# Altium PCB MCS17.PcbDoc (part 3 of 3)
Units mil, origin at the board's own origin, x right, y up, seen from the top; angles counter-clockwise.
Board outline 8500 x 5400 mil, 2 copper layers (Top Layer, Bottom Layer), stack 81.54 mil thick; 114 components, 70 nets, 364 pads, 106 vias.
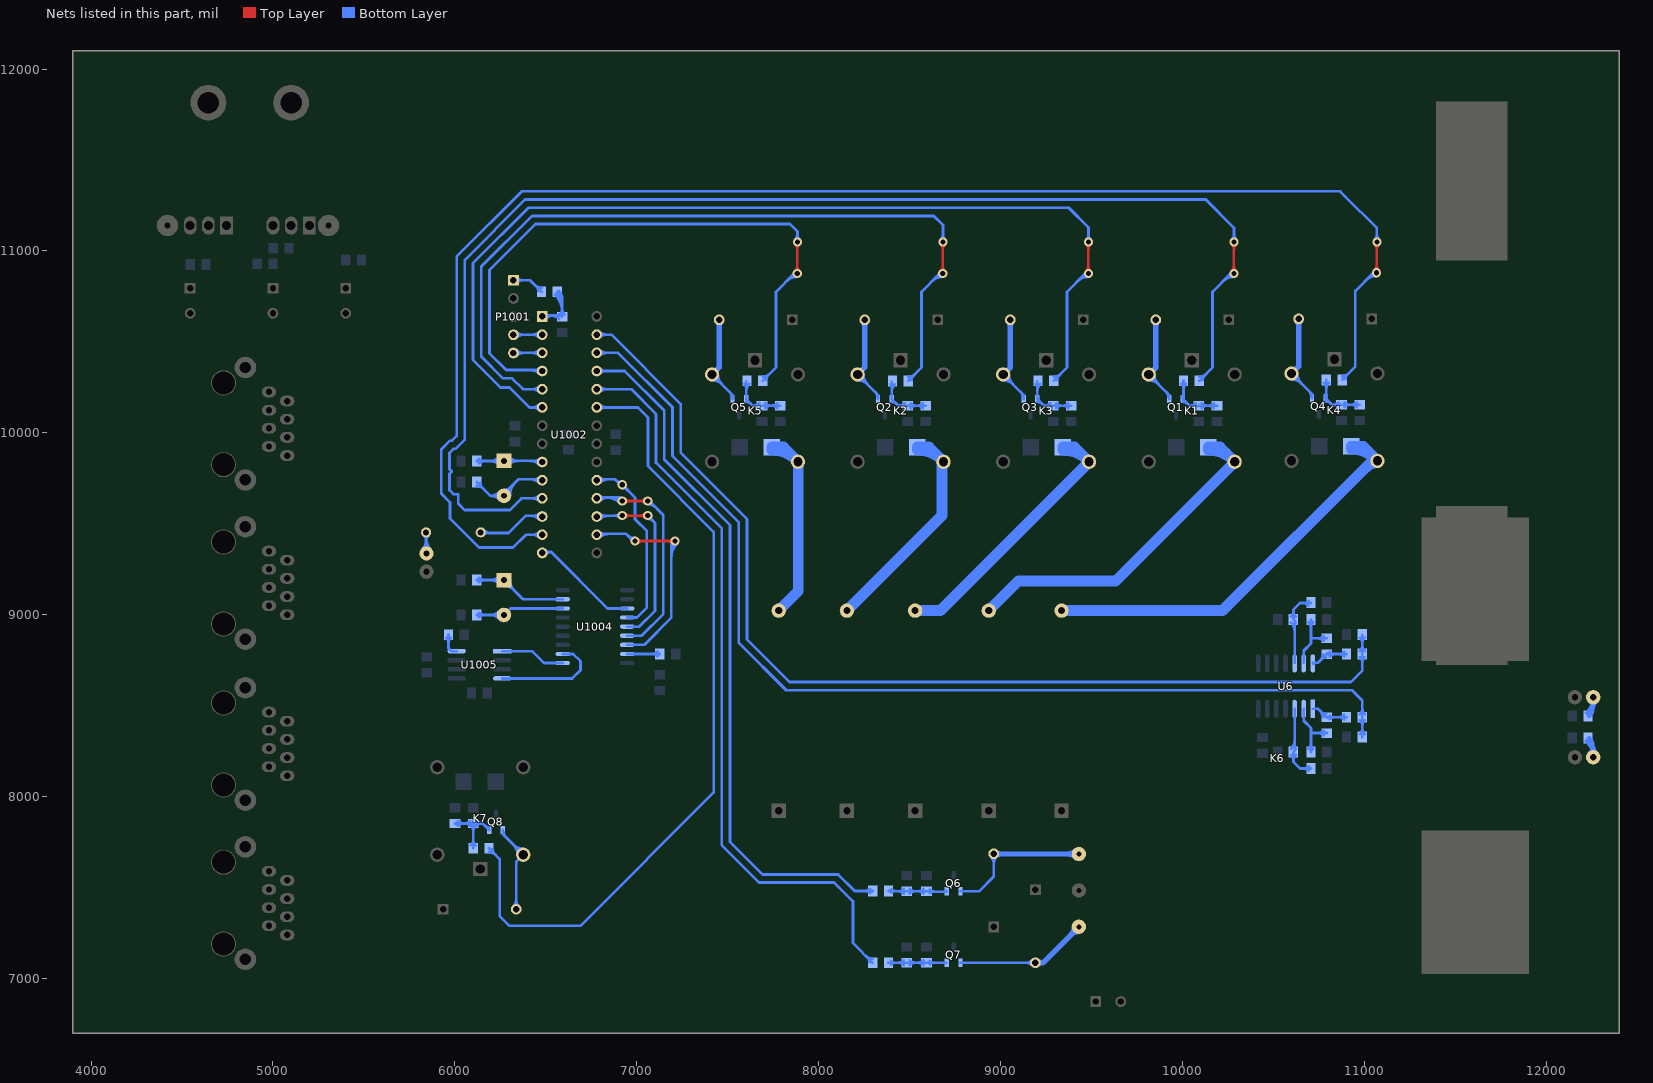
[diagram p3: the nets of this part, all layers, seen from the top]

## Via types
v1: diameter 50, hole 28, Top Layer to Bottom Layer, 85 vias
v2: diameter 196.85, hole 118.11, Top Layer to Bottom Layer, 12 vias
v3: diameter 157.48, hole 157.48, Top Layer to Bottom Layer, 7 vias
v4: diameter 137.8, hole 137.8, Top Layer to Bottom Layer, 2 vias

## Nets (pads, with @x,y where several pads share a name; then routed paths per layer and width w, separated by ;. In a path a pad name is that pad's centre, name@x,y a point inside that pad or via, vN(x,y) a via of type N, cw(c..) or ccw(c..) an arc to the next point about the centre after c; other vN are vias at no path point) (continued)
LED: R1001.2 U1002.12 | length 525.6
  Bottom Layer w15: R1001.2@6143.31,9450 6295,9450 6390,9545 U1002.12@6470,9545 ; R1001.2@6156.18,9438.82 cw(c6183.18,9411.82) 6183.18,9450 ; R1001.2@6156.18,9467.18 ccw(c6197.67,9508.67) 6197.67,9450 ; 6414.75,9545 cw(c6414.75,9474.75) U1002.12@6464.42,9524.42 ; 6438.89,9545 ccw(c6438.89,9581.11) U1002.12@6464.42,9555.58
MCP2515_INT: U1002.14 U1004.12 | length 671.3
  Bottom Layer w15: U1002.14@6470,9345 6480,9345 6530,9345 ; U1002.14@6495.58,9355.58 ccw(c6521.11,9381.11) 6521.11,9345 ; U1002.14@6498.43,9327.94 cw(c6530,9307.27) 6530,9345 ; U1004.12@6947.17,9035 6840,9035 6530,9345
MCP2515_MISO: U1002.18 U1004.15 | length 1666
  Top Layer w15: v1(6920,9625) v1(7060,9625) ; v1@6932.37,9612.63 cw(c6962.25,9582.75) 6962.25,9625 cw(c6962.25,9667.25) v1@6932.37,9637.37 ; v1@7047.63,9612.63 ccw(c7017.75,9582.75) 7017.75,9625 ccw(c7017.75,9667.25) v1@7047.63,9637.37
  Bottom Layer w15: U1002.18@6770,9645 6780,9645 6900,9645 v1(6920,9625) ; U1002.18@6795.58,9624.42 cw(c6845.25,9574.75) 6845.25,9645 ; U1002.18@6795.58,9655.58 ccw(c6821.11,9681.11) 6821.11,9645 ; 6829.47,9645 cw(c6829.47,9534.47) v1@6907.63,9612.63 ; 6865.68,9645 cw(c6865.68,9570.68) v1@6918.23,9623.23 ; 6901.89,9645 cw(c6901.89,9606.89) v1@6928.84,9633.84 ; U1004.15@6947.17,8885 7027.28,8885 7145,9002.72 7145,9550 7070,9625 v1(7060,9625) ; v1@7060,9607.5 cw(c7060,9541.11) 7106.95,9588.05 ; v1@7077.5,9625 ccw(c7095.61,9625) 7082.8,9612.2
MCP2515_MOSI: U1002.17 U1004.14 | length 1377.8
  Top Layer w15: v1(6920,9545) v1(7060,9545) v1@7070,9545 ; v1@6932.37,9532.63 cw(c6962.25,9502.75) 6962.25,9545 cw(c6962.25,9587.25) v1@6932.37,9557.37 ; v1@7047.63,9532.63 ccw(c7017.75,9502.75) 7017.75,9545 ccw(c7017.75,9587.25) v1@7047.63,9557.37
  Bottom Layer w15: U1002.17@6770,9545 6780,9545 v1(6920,9545) ; U1002.17@6795.58,9524.42 cw(c6845.25,9474.75) 6845.25,9545 ; U1002.17@6795.58,9555.58 ccw(c6821.11,9581.11) 6821.11,9545 ; v1@6907.63,9532.63 ccw(c6877.75,9502.75) 6877.75,9545 ccw(c6877.75,9587.25) v1@6907.63,9557.37 ; U1004.14@6947.17,8935 7013.64,8935 7100,9021.36 7100,9505 v1(7060,9545) ; v1@7060,9527.5 cw(c7060,9485.25) 7089.87,9515.13 cw(c7119.75,9545) v1@7077.5,9545
MCP2515_SCK: U1002.19 U1004.13 | length 1221.1
  Bottom Layer w15: U1002.19@6770,9745 6780,9745 6880,9745 6900,9725 6910,9725 v1(6920,9715) 6990,9645 6990,9525 7055,9460 7055,9040 7000,8985 U1004.13@6947.17,8985 ; U1002.19@6795.58,9724.42 cw(c6845.25,9674.75) 6845.25,9745 ; U1002.19@6795.58,9755.58 ccw(c6821.11,9781.11) 6821.11,9745 ; 6885,9740 ccw(c6907.21,9762.21) v1@6915.42,9731.89 ; 6897.2,9727.8 cw(c6884.39,9715) v1@6902.5,9715 ; v1@6920,9697.5 cw(c6920,9655.25) 6949.87,9685.13 cw(c6979.75,9715) v1@6937.5,9715
MCP2515_SS: U1002.16 U1004.16 | length 1645
  Top Layer w15: v1(6990,9405) v1(7210,9405) ; v1@7002.37,9392.63 cw(c7032.25,9362.75) 7032.25,9405 cw(c7032.25,9447.25) v1@7002.37,9417.37 ; v1@7197.63,9392.63 ccw(c7167.75,9362.75) 7167.75,9405 ccw(c7167.75,9447.25) v1@7197.63,9417.37
  Bottom Layer w15: U1002.16@6770,9445 6780,9445 6940,9445 6980,9405 v1(6990,9405) ; U1002.16@6795.58,9424.42 cw(c6845.25,9374.75) 6845.25,9445 ; U1002.16@6795.58,9455.58 ccw(c6821.11,9481.11) 6821.11,9445 ; 6945,9440 ccw(c6987.35,9482.35) v1@6989.4,9422.49 ; U1004.16@6947.17,8835 7040.92,8835 7190,8984.08 7190,9385 v1(7210,9405) ; 6967.2,9417.8 cw(c6954.39,9405) v1@6972.5,9405 ; 7190,9314.47 cw(c7300.53,9314.47) v1@7222.37,9392.63 ; 7190,9350.68 cw(c7264.32,9350.68) v1@7211.77,9403.23 ; 7190,9386.89 cw(c7228.11,9386.89) v1@7201.16,9413.84
NetC1_2: C1.2 Q1.2 R4.1 R17.2 | length 623.6
  Bottom Layer w15: R4.1@9992.68,10269.53 cw(c9961.8,10238.65) 10005.47,10238.65 cw(c10049.15,10238.65) R4.1@10018.26,10269.53 ; Q1.2@9998.13,10199.43 ccw(c9980.41,10217.15) 10005.47,10217.15 ; Q1.2@10001.18,10170.41 cw(c10001.18,10133.87) 10027.02,10159.71 ; Q1.2@10001.18,10185.55 10037.17,10149.57 R17.2@10088.78,10149.57 C1.2@10188.78,10149.57 ; Q1.2@10005.47,10187.95 R4.1@10005.47,10286.26 ; R17.2@10072.05,10136.78 ccw(c10041.17,10105.89) 10041.17,10149.57 ccw(c10041.17,10193.24) R17.2@10072.05,10162.36 ; R17.2@10105.51,10136.78 cw(c10136.39,10105.89) 10136.39,10149.57 cw(c10136.39,10193.24) R17.2@10105.51,10162.36 ; C1.2@10172.05,10136.78 ccw(c10141.17,10105.89) 10141.17,10149.57 ccw(c10141.17,10193.24) C1.2@10172.05,10162.36
NetC2_2: C2.2 Q2.2 R5.1 R18.2 | length 600.3
  Bottom Layer w15: R5.1@8392.68,10267.84 cw(c8372.16,10247.32) 8401.18,10247.32 ; Q2.2@8401.18,10170.41 cw(c8401.18,10133.87) 8427.02,10159.71 ; 8401.18,10226.6 cw(c8459.51,10226.6) R5.1@8418.26,10267.84 ; R5.1@8401.18,10280.28 Q2.2@8401.18,10185.55 8437.17,10149.57 R18.2@8488.78,10149.57 C2.2@8588.78,10149.57 ; R18.2@8472.05,10136.78 ccw(c8441.17,10105.89) 8441.17,10149.57 ccw(c8441.17,10193.24) R18.2@8472.05,10162.36 ; R18.2@8505.51,10136.78 cw(c8536.39,10105.89) 8536.39,10149.57 cw(c8536.39,10193.24) R18.2@8505.51,10162.36 ; C2.2@8572.05,10136.78 ccw(c8541.17,10105.89) 8541.17,10149.57 ccw(c8541.17,10193.24) C2.2@8572.05,10162.36
NetC3_2: C3.2 Q3.2 R16.1 R19.2 | length 602
  Bottom Layer w15: R16.1@9192.68,10269.53 cw(c9172.16,10249.01) 9201.18,10249.01 ; Q3.2@9201.18,10170.41 cw(c9201.18,10133.87) 9227.02,10159.71 ; 9201.18,10228.29 cw(c9259.51,10228.29) R16.1@9218.26,10269.53 ; R16.1@9201.18,10281.97 Q3.2@9201.18,10185.55 9237.17,10149.57 R19.2@9288.78,10149.57 C3.2@9388.78,10149.57 ; R19.2@9272.05,10136.78 ccw(c9241.17,10105.89) 9241.17,10149.57 ccw(c9241.17,10193.24) R19.2@9272.05,10162.36 ; R19.2@9305.51,10136.78 cw(c9336.39,10105.89) 9336.39,10149.57 cw(c9336.39,10193.24) R19.2@9305.51,10162.36 ; C3.2@9372.05,10136.78 ccw(c9341.17,10105.89) 9341.17,10149.57 ccw(c9341.17,10193.24) C3.2@9372.05,10162.36
NetC4_2: C4.2 Q4.2 R22.1 R24.2 | length 623.6
  Bottom Layer w15: R22.1@10777.68,10274.22 cw(c10746.8,10243.33) 10790.47,10243.33 cw(c10834.15,10243.33) R22.1@10803.26,10274.22 ; Q4.2@10783.13,10204.43 ccw(c10765.41,10222.15) 10790.47,10222.15 ; Q4.2@10786.18,10175.41 cw(c10786.18,10138.87) 10812.02,10164.71 ; Q4.2@10786.18,10190.55 10822.17,10154.57 R24.2@10873.78,10154.57 C4.2@10973.78,10154.57 ; Q4.2@10790.47,10192.95 R22.1@10790.47,10290.95 R22.1@10790.47,10291.26 ; R24.2@10857.05,10141.78 ccw(c10826.17,10110.89) 10826.17,10154.57 ccw(c10826.17,10198.24) R24.2@10857.05,10167.36 ; R24.2@10890.51,10141.78 cw(c10921.39,10110.89) 10921.39,10154.57 cw(c10921.39,10198.24) R24.2@10890.51,10167.36 ; C4.2@10957.05,10141.78 ccw(c10926.17,10110.89) 10926.17,10154.57 ccw(c10926.17,10198.24) C4.2@10957.05,10167.36
NetC5_2: C5.2 Q5.2 R23.1 R25.2 | length 602
  Bottom Layer w15: R23.1@7592.68,10269.53 cw(c7572.16,10249.01) 7601.18,10249.01 ; Q5.2@7601.18,10170.41 cw(c7601.18,10133.87) 7627.02,10159.71 ; 7601.18,10228.29 cw(c7659.51,10228.29) R23.1@7618.26,10269.53 ; R23.1@7601.18,10281.97 Q5.2@7601.18,10185.55 7637.17,10149.57 R25.2@7688.78,10149.57 C5.2@7788.78,10149.57 ; R25.2@7672.05,10136.78 ccw(c7641.17,10105.89) 7641.17,10149.57 ccw(c7641.17,10193.24) R25.2@7672.05,10162.36 ; R25.2@7705.51,10136.78 cw(c7736.39,10105.89) 7736.39,10149.57 cw(c7736.39,10193.24) R25.2@7705.51,10162.36 ; C5.2@7772.05,10136.78 ccw(c7741.17,10105.89) 7741.17,10149.57 ccw(c7741.17,10193.24) C5.2@7772.05,10162.36
NetC7_2: C7.2 Q6.2 R26.1 R28.2 | length 635.2
  Bottom Layer w15: R26.1@8383.31,7482 8417,7482 ; R26.1@8398.39,7472.01 cw(c8417,7459.67) 8417,7482 ; R26.1@8398.39,7491.99 ccw(c8417,7504.33) 8417,7482 ; C7.2@8467.27,7467.35 ccw(c8436.39,7436.47) 8436.39,7480.14 ccw(c8436.39,7523.82) C7.2@8467.27,7492.93 ; C7.2@8500.73,7467.35 cw(c8531.61,7436.47) 8531.61,7480.14 cw(c8531.61,7523.82) C7.2@8500.73,7492.93 ; R28.2@8576.27,7467.35 ccw(c8545.39,7436.47) 8545.39,7480.14 ccw(c8545.39,7523.82) R28.2@8576.27,7492.93 ; R28.2@8611.93,7470.01 cw(c8631,7457.12) 8631,7480.14 ; R28.2@8611.93,7490.27 ccw(c8631,7503.16) 8631,7480.14 ; 8686.55,7477 ccw(c8686.55,7497.65) Q6.2@8701.15,7483.05 ; Q6.2@8704.2,7480 8701.2,7477 8634.14,7477 8631,7480.14 ; 8417,7482 8418.86,7480.14 C7.2@8484,7480.14 R28.2@8593,7480.14 8631,7480.14
NetC8_2: C8.2 Q7.2 R27.1 R29.2 | length 616.3
  Bottom Layer w15: R27.1@8383.31,7087 8417,7087 ; R27.1@8398.39,7077.01 cw(c8417,7064.67) 8417,7087 ; R27.1@8398.39,7096.99 ccw(c8417,7109.33) 8417,7087 ; C8.2@8467.27,7074.8 ccw(c8436.39,7043.92) 8436.39,7087.59 ccw(c8436.39,7131.26) C8.2@8467.27,7100.38 ; C8.2@8500.73,7074.8 cw(c8531.61,7043.92) 8531.61,7087.59 cw(c8531.61,7131.26) C8.2@8500.73,7100.38 ; R29.2@8576.27,7074.8 ccw(c8545.39,7043.92) 8545.39,7087.59 ccw(c8545.39,7131.26) R29.2@8576.27,7100.38 ; R29.2@8611.93,7077.46 cw(c8631,7064.57) 8631,7087.59 ; R29.2@8611.93,7097.72 ccw(c8631,7110.61) 8631,7087.59 ; Q7.2@8704.2,7086.71 8631.88,7086.71 8631,7087.59 ; 8417,7087 8417.59,7087.59 C8.2@8484,7087.59 R29.2@8593,7087.59 8631,7087.59
NetC9_2: C9.2 Q8.2 R30.1 R33.2 | length 710.9
  Bottom Layer w15: C9.2@6001,7853 R33.2@6101,7853 ; C9.2@6017.73,7840.21 cw(c6048.61,7809.33) 6048.61,7853 cw(c6048.61,7896.67) C9.2@6017.73,7865.79 ; R33.2@6084.27,7840.21 ccw(c6053.39,7809.33) 6053.39,7853 ccw(c6053.39,7896.67) R33.2@6084.27,7865.79 ; R30.1@6088.21,7733.04 ccw(c6057.33,7763.92) 6101,7763.92 ccw(c6144.67,7763.92) R30.1@6113.79,7733.04 ; R33.2@6088.21,7840.21 cw(c6057.33,7809.33) 6101,7809.33 cw(c6144.67,7809.33) R33.2@6113.79,7840.21 ; R30.1@6101,7716.31 R33.2@6101,7853 ; R33.2@6117.73,7840.21 cw(c6148.61,7809.33) 6148.61,7853 cw(c6148.61,7896.67) R33.2@6117.73,7865.79 ; 6162.76,7842.86 ccw(c6188.6,7868.7) Q8.2@6188.6,7832.15 ; Q8.2@6188.6,7817.02 6152.61,7853 R33.2@6101,7853
NetC18_2: C18.2 R8.1 U1002.26 | length 6034.6
  Bottom Layer w15: U1002.26@6780,10440 6896.92,10440 7196,10140.92 7196,9939.64 7196,9873.28 7561,9508.28 7561,8845.36 7821.36,8585 10931,8585 10988.31,8527.69 R8.1@10988.31,8437 C18.2@10988.31,8328 ; U1002.26@6795.58,10424.42 cw(c6833.18,10386.82) 6833.18,10440 cw(c6833.18,10493.18) U1002.26@6795.58,10455.58 ; C18.2@10975.52,8344.73 ccw(c10944.63,8375.61) 10988.31,8375.61 ccw(c11031.98,8375.61) C18.2@11001.1,8344.73 ; R8.1@10975.52,8420.27 cw(c10944.63,8389.39) 10988.31,8389.39 cw(c11031.98,8389.39) R8.1@11001.1,8420.27 ; R8.1@10975.52,8453.73 ccw(c10944.63,8484.61) 10988.31,8484.61 ccw(c11031.98,8484.61) R8.1@11001.1,8453.73
NetC19_2: C19.2 R13.1 U1002.27 | length 6057.8
  Bottom Layer w15: U1002.27@6780,10540 6860.56,10540 7241,10159.56 7241,9958.28 7241,9891.92 7606,9526.92 7606,8864 7840,8630 10925,8630 10988.31,8693.31 R13.1@10988.31,8784 C19.2@10988.31,8891 ; U1002.27@6795.58,10524.42 cw(c6833.18,10486.82) 6833.18,10540 cw(c6833.18,10593.18) U1002.27@6795.58,10555.58 ; R13.1@10975.52,8767.27 cw(c10944.63,8736.39) 10988.31,8736.39 cw(c11031.98,8736.39) R13.1@11001.1,8767.27 ; R13.1@10975.52,8800.73 ccw(c10944.63,8831.61) 10988.31,8831.61 ccw(c11031.98,8831.61) R13.1@11001.1,8800.73 ; C19.2@10975.52,8874.27 cw(c10944.63,8843.39) 10988.31,8843.39 cw(c11031.98,8843.39) C19.2@11001.1,8874.27
NetC1012_1: C1012.1 R1002.2 U1002.1 | length 705.1
  Bottom Layer w15: U1002.1@6480,10645 R1002.2@6583.31,10645 ; U1002.1@6495.58,10624.42 cw(c6545.25,10574.75) 6545.25,10645 ; U1002.1@6495.58,10655.58 ccw(c6521.11,10681.11) 6521.11,10645 ; 6526.23,10645 cw(c6526.23,10578.47) R1002.2@6573.27,10625.52 ; C1012.1@6550.52,10759.27 cw(c6455.19,10663.95) 6590,10663.95 ; 6558.55,10645 ccw(c6558.55,10665.82) R1002.2@6573.27,10651.1 ; C1012.1@6561.12,10769.88 cw(c6491.4,10700.16) 6590,10700.16 ; C1012.1@6563.31,10776 6590,10749.31 R1002.2@6590,10638.31 ; C1012.1@6571.73,10780.48 cw(c6527.62,10736.37) 6590,10736.37 ; R1002.2@6577.21,10651.1 ccw(c6546.33,10681.98) 6590,10681.98 ccw(c6633.67,10681.98) R1002.2@6602.79,10651.1
NetC1014_2: C1014.2 U1004.8 Y1002.1 | length 964.6
  Bottom Layer w15: C1014.2@6120,9191.06 Y1002.1@6270,9191.06 6376.06,9085 U1004.8@6592.83,9085 ; C1014.2@6132.79,9178.27 cw(c6163.67,9147.39) 6163.67,9191.06 cw(c6163.67,9234.74) C1014.2@6132.79,9203.85 ; Y1002.1@6247.02,9168.08 ccw(c6191.54,9112.6) 6191.54,9191.06 ccw(c6191.54,9269.52) Y1002.1@6247.02,9214.04 ; Y1002.1@6257.63,9178.69 ccw(c6227.75,9148.81) 6227.75,9191.06 ccw(c6227.75,9233.31) Y1002.1@6257.63,9203.44 ; Y1002.1@6270,9158.56 cw(c6270,9080.1) 6325.48,9135.58 cw(c6380.96,9191.06) Y1002.1@6302.5,9191.06 ; Y1002.1@6270,9173.56 cw(c6270,9131.31) 6299.87,9161.19 cw(c6329.75,9191.06) Y1002.1@6287.5,9191.06
NetC1015_2: C1015.2 U1004.7 Y1002.2 | length 746
  Bottom Layer w15: C1015.2@6120,8998.94 Y1002.2@6270,8998.94 6306.06,9035 U1004.7@6592.83,9035 ; C1015.2@6132.79,8986.15 cw(c6163.67,8955.26) 6163.67,8998.94 cw(c6163.67,9042.61) C1015.2@6132.79,9011.73 ; Y1002.2@6247.02,8975.96 ccw(c6191.54,8920.48) 6191.54,8998.94 ccw(c6191.54,9077.4) Y1002.2@6247.02,9021.92 ; Y1002.2@6257.63,8986.56 ccw(c6227.75,8956.69) 6227.75,8998.94 ccw(c6227.75,9041.19) Y1002.2@6257.63,9011.31
NetD1_1: D1.1 K1.5 Q1.1 | length 770
  Bottom Layer w15: K1.5@9813.78,10289.39 cw(c9813.78,10212.45) 9868.19,10266.85 cw(c9922.59,10321.26) K1.5@9845.65,10321.26 ; K1.5@9813.78,10304.39 cw(c9813.78,10263.66) 9842.58,10292.46 cw(c9871.38,10321.26) K1.5@9830.65,10321.26 ; K1.5@9813.78,10321.26 9926.38,10208.66 Q1.1@9926.38,10185.55 ; 9910.33,10224.71 cw(c9882,10196.38) Q1.1@9922.07,10196.38
  Bottom Layer w30: K1.5@9813.78,10321.26 9852.99,10360.47 D1.1@9852.99,10621.26 ; D1.1@9842.72,10610.99 cw(c9817.92,10586.19) 9852.99,10586.19 cw(c9888.07,10586.19) D1.1@9863.27,10610.99
NetD2_1: D2.1 K2.5 Q2.1 | length 770
  Bottom Layer w15: K2.5@8213.78,10289.39 cw(c8213.78,10212.45) 8268.19,10266.85 cw(c8322.59,10321.26) K2.5@8245.65,10321.26 ; K2.5@8213.78,10304.39 cw(c8213.78,10263.66) 8242.58,10292.46 cw(c8271.38,10321.26) K2.5@8230.65,10321.26 ; K2.5@8213.78,10321.26 8326.38,10208.66 Q2.1@8326.38,10185.55 ; 8310.33,10224.71 cw(c8282,10196.38) Q2.1@8322.07,10196.38
  Bottom Layer w30: K2.5@8213.78,10321.26 8252.99,10360.47 D2.1@8252.99,10621.26 ; D2.1@8242.72,10610.99 cw(c8217.92,10586.19) 8252.99,10586.19 cw(c8288.07,10586.19) D2.1@8263.27,10610.99
NetD3_1: D3.1 K3.5 Q3.1 | length 770
  Bottom Layer w15: K3.5@9013.78,10289.39 cw(c9013.78,10212.45) 9068.19,10266.85 cw(c9122.59,10321.26) K3.5@9045.65,10321.26 ; K3.5@9013.78,10304.39 cw(c9013.78,10263.66) 9042.58,10292.46 cw(c9071.38,10321.26) K3.5@9030.65,10321.26 ; K3.5@9013.78,10321.26 9126.38,10208.66 Q3.1@9126.38,10185.55 ; 9110.33,10224.71 cw(c9082,10196.38) Q3.1@9122.07,10196.38
  Bottom Layer w30: K3.5@9013.78,10321.26 9052.99,10360.47 D3.1@9052.99,10621.26 ; D3.1@9042.72,10610.99 cw(c9017.92,10586.19) 9052.99,10586.19 cw(c9088.07,10586.19) D3.1@9063.27,10610.99
NetD4_2: D4.2 K1.3 R1.2 | length 2093
  Bottom Layer w60: R1.2@8935,9022.83 9097.17,9185 9632.44,9185 K1.3@10272.44,9825 ; D4.2@10142.36,9905.98 cw(c10142.36,9715.7) K1.3@10276.92,9850.25 ; D4.2@10142.36,9921.26 10205.91,9921.26 K1.3@10286.22,9840.95 ; D4.2@10148.24,9907.16 cw(c10179.77,9831.59) 10237.68,9889.49
NetD5_2: D5.2 K2.3 R2.2 | length 1494.5
  Bottom Layer w60: R2.2@8155,9022.83 8677.44,9545.27 K2.3@8677.44,9836.38 ; D5.2@8542.36,9905.98 cw(c8542.36,9715.7) K2.3@8676.92,9850.25 ; D5.2@8542.36,9921.26 8605.91,9921.26 K2.3@8686.22,9840.95 ; D5.2@8548.24,9907.16 cw(c8579.77,9831.59) 8637.68,9889.49 ; 8677.44,9797.13 cw(c8730.04,9797.13) K2.3@8692.85,9834.32
NetD6_2: D6.2 K3.3 R3.2 | length 1705.6
  Bottom Layer w60: R3.2@8530,9022.83 8668.89,9022.83 K3.3@9477.44,9831.38 ; D6.2@9342.36,9905.98 cw(c9342.36,9715.7) K3.3@9476.92,9850.25 ; D6.2@9342.36,9921.26 9405.91,9921.26 K3.3@9486.22,9840.95 ; D6.2@9348.24,9907.16 cw(c9379.77,9831.59) 9437.68,9889.49
NetD7_1: D7.1 K4.5 Q4.1 | length 770
  Bottom Layer w15: K4.5@10598.78,10294.39 cw(c10598.78,10217.45) 10653.19,10271.85 cw(c10707.59,10326.26) K4.5@10630.65,10326.26 ; K4.5@10598.78,10309.39 cw(c10598.78,10268.66) 10627.58,10297.46 cw(c10656.38,10326.26) K4.5@10615.65,10326.26 ; K4.5@10598.78,10326.26 10711.38,10213.66 Q4.1@10711.38,10190.55 ; 10695.33,10229.71 cw(c10667,10201.38) Q4.1@10707.07,10201.38
  Bottom Layer w30: K4.5@10598.78,10326.26 10637.99,10365.47 D7.1@10637.99,10626.26 ; D7.1@10627.72,10615.99 cw(c10602.92,10591.19) 10637.99,10591.19 cw(c10673.07,10591.19) D7.1@10648.27,10615.99
NetD8_1: D8.1 K5.5 Q5.1 | length 770
  Bottom Layer w15: K5.5@7413.78,10289.39 cw(c7413.78,10212.45) 7468.19,10266.85 cw(c7522.59,10321.26) K5.5@7445.65,10321.26 ; K5.5@7413.78,10304.39 cw(c7413.78,10263.66) 7442.58,10292.46 cw(c7471.38,10321.26) K5.5@7430.65,10321.26 ; K5.5@7413.78,10321.26 7526.38,10208.66 Q5.1@7526.38,10185.55 ; 7510.33,10224.71 cw(c7482,10196.38) Q5.1@7522.07,10196.38
  Bottom Layer w30: K5.5@7413.78,10321.26 7452.99,10360.47 D8.1@7452.99,10621.26 ; D8.1@7442.72,10610.99 cw(c7417.92,10586.19) 7452.99,10586.19 cw(c7488.07,10586.19) D8.1@7463.27,10610.99
NetD9_2: D9.2 K4.3 R20.2 | length 2555.9
  Bottom Layer w60: R20.2@9335,9022.83 10220.27,9022.83 K4.3@11052.44,9855 ; D9.2@10927.36,9910.98 cw(c10927.36,9720.7) K4.3@11061.92,9855.25 ; D9.2@10927.36,9926.26 10990.91,9926.26 K4.3@11071.22,9845.95 ; D9.2@10933.24,9912.16 cw(c10964.77,9836.59) 11022.68,9894.49 ; 11007.71,9810.27 cw(c11071.22,9746.76) K4.3@11071.22,9836.58
NetD10_2: D10.2 K5.3 R21.2 | length 1291.3
  Bottom Layer w60: D10.2@7742.36,9905.98 cw(c7742.36,9715.7) K5.3@7876.92,9850.25 ; D10.2@7742.36,9921.26 7805.91,9921.26 K5.3@7886.22,9840.95 ; D10.2@7748.24,9907.16 cw(c7779.77,9831.59) 7837.68,9889.49 ; R21.2@7780,9022.83 7887.44,9130.27 7887.44,9840.95 K5.3@7887.44,9846.38
NetD11_1: D11.1 K6.3 Q6.1 | length 1038.5
  Bottom Layer w15: Q6.1@8779,7480 8880,7480 8962.79,7562.79 D11.1@8962.79,7685 ; D11.1@8946.42,7670.21 cw(c8906.92,7630.71) 8962.79,7630.71 ; 8962.79,7634.51 cw(c9013.28,7634.51) D11.1@8977.58,7670.21
  Bottom Layer w30: D11.1@8962.79,7685 K6.3@9430,7685 ; D11.1@8972.27,7675.51 cw(c8995.17,7652.62) 8995.17,7685 ; D11.1@8972.27,7696.06 ccw(c8998.97,7722.76) 8998.97,7685 ; K6.3@9412.77,7667.77 ccw(c9371.17,7626.17) 9371.17,7685 ccw(c9371.17,7743.83) K6.3@9412.77,7702.23
NetD12_1: D12.1 K6.5 Q7.1 | length 963.5
  Bottom Layer w15: Q7.1@8779.5,7087.21 D12.1@9191,7087.21 ; D12.1@9175.42,7071.64 ccw(c9137.82,7034.03) 9137.82,7087.21 ccw(c9137.82,7140.39) D12.1@9175.42,7102.79
  Bottom Layer w30: D12.1@9191,7087.21 9232.21,7087.21 K6.5@9430,7285 ; D12.1@9201.27,7076.94 cw(c9226.07,7052.14) 9226.07,7087.21 cw(c9226.07,7122.29) D12.1@9201.27,7097.49 ; K6.5@9405.63,7285 cw(c9346.8,7285) 9388.4,7243.4 cw(c9430,7201.8) K6.5@9430,7260.63
NetD13_1: D13.1 K7.5 Q8.1 | length 798.4
  Bottom Layer w15: Q8.1@6263.4,7817.02 6263.4,7793.91 K7.5@6376,7681.31 6336.79,7642.09 D13.1@6336.79,7381.31 ; Q8.1@6267.71,7806.19 ccw(c6307.78,7806.19) 6279.45,7777.86 ; D13.1@6321.21,7396.88 ccw(c6283.61,7434.49) 6336.79,7434.49 ccw(c6389.97,7434.49) D13.1@6352.36,7396.88 ; K7.5@6344.13,7681.31 ccw(c6267.19,7681.31) 6321.59,7735.71 ccw(c6376,7790.12) K7.5@6376,7713.18 ; K7.5@6359.13,7681.31 ccw(c6318.4,7681.31) 6347.2,7710.11 ccw(c6376,7738.91) K7.5@6376,7698.18
NetLD1_2: LD1.2 R31.2 | length 519
  Bottom Layer w15: R31.2@12217.11,8460.72 ccw(c12143.76,8546.99) LD1.2@12257,8547 12257,8471.18 ; R31.2@12226.82,8449.29 ccw(c12171.34,8514.55) LD1.2@12257,8514.55 ; R31.2@12228.82,8443 12257,8471.18 ; LD1.2@12234.7,8524.23 cw(c12182.74,8471.18) 12257,8471.18 ; R31.2@12236.54,8437.86 ccw(c12198.92,8482.11) 12257,8482.11 ; LD1.2@12245.2,8534.95 cw(c12217.69,8506.86) 12257,8506.86 cw(c12296.31,8506.86) LD1.2@12268.8,8534.95 ; LD1.2@12279.3,8524.23 ccw(c12331.26,8471.18) 12257,8471.18
NetLD2_2: LD2.2 R32.2 | length 535.9
  Bottom Layer w15: R32.2@12216.54,8305.79 cw(c12130.81,8213.19) LD2.2@12257,8213.19 ; R32.2@12226.73,8316.8 cw(c12162.59,8247.51) LD2.2@12257,8247.51 ; R32.2@12228.82,8323 12257,8294.82 LD2.2@12257,8217 ; LD2.2@12234.46,8239.54 ccw(c12180.06,8293.94) 12257,8293.94 ccw(c12333.94,8293.94) LD2.2@12279.54,8239.54 ; R32.2@12236.92,8327.8 cw(c12194.37,8281.84) 12257,8281.84 ; LD2.2@12245.07,8228.93 ccw(c12216.27,8257.73) 12257,8257.73 ccw(c12297.73,8257.73) LD2.2@12268.93,8228.93
NetLD1001_1: LD1001.1 R1001.1 | length 348.3
  Bottom Layer w15: LD1001.1@5821.46,9359.54 ccw(c5771.89,9409.11) 5842,9409.11 ; R1001.1@5827.82,9438.82 cw(c5793.57,9404.57) 5842,9404.57 cw(c5890.43,9404.57) R1001.1@5856.18,9438.82 ; LD1001.1@5842,9339 R1001.1@5842,9453 ; 5842,9382.56 ccw(c5889.56,9382.56) LD1001.1@5855.93,9348.93 ; 5842,9418.77 ccw(c5925.77,9418.77) LD1001.1@5866.54,9359.54
NetR4_2: R4.2 U1002.11 | length 7736.1
  Top Layer w15: v1@10269.63,10887.37 ccw(c10239.75,10917.25) 10282,10917.25 ccw(c10324.25,10917.25) v1@10294.37,10887.37 ; v1@10270.63,11037.63 cw(c10243.17,11010.17) 10282,11010.17 ; v1(10282,10875) v1@10282,11044 ; 10282,11005.34 cw(c10327.66,11005.34) v1@10295.37,11037.63
  Bottom Layer w15: U1002.11@6464.42,9624.42 ccw(c6426.82,9586.82) 6426.82,9640 ccw(c6426.82,9693.18) U1002.11@6464.42,9655.58 ; U1002.11@6480,9640 6365.66,9640 6302.1,9576.44 6053.56,9576.44 6018.62,9611.38 6018.62,9662.97 5992.26,9662.97 5970.3,9684.94 5970.3,9775.06 5982.73,9787.5 5970.3,9799.94 5970.3,9890.06 5992.26,9912.03 6003.39,9912.03 6055,9963.64 6055,10951.36 6386.14,11282.5 10127.5,11282.5 10283,11127 v1(10283,11050) ; R4.2@10092.09,10286.26 10165,10359.17 10165,10775 10265,10875 v1(10282,10875) ; R4.2@10092.09,10308.29 ccw(c10092.09,10361.47) 10129.69,10323.86 ; R4.2@10110.18,10290.2 cw(c10144.35,10290.2) 10120.19,10314.36 ; 10223.1,10833.1 cw(c10282,10774.21) v1@10282,10857.5 ; 10248.71,10858.71 cw(c10282,10825.42) v1@10282,10872.5 ; v1@10270.63,11062.37 ccw(c10240.75,11092.25) 10283,11092.25 ccw(c10325.25,11092.25) v1@10295.37,11062.37
NetR5_2: R5.2 U1002.5 | length 4970.7
  Top Layer w15: v1@8669.63,10887.37 ccw(c8639.75,10917.25) 8682,10917.25 ccw(c8724.25,10917.25) v1@8694.37,10887.37 ; v1@8670.63,11037.63 cw(c8643.17,11010.17) 8682,11010.17 ; v1(8682,10875) v1@8682,11044 ; 8682,11005.34 cw(c8727.66,11005.34) v1@8695.37,11037.63
  Bottom Layer w15: U1002.5@6464.42,10224.42 ccw(c6426.82,10186.82) 6426.82,10240 ccw(c6426.82,10293.18) U1002.5@6464.42,10255.58 ; U1002.5@6480,10240 6373.64,10240 6313.64,10300 6263.64,10300 6145,10418.64 6145,10914.08 6423.42,11192.5 8632.5,11192.5 8683,11142 v1(8683,11050) ; R5.2@8492.09,10286.26 8565,10359.17 8565,10775 8665,10875 v1(8682,10875) ; R5.2@8492.09,10306.59 ccw(c8492.09,10355.69) 8526.8,10320.97 ; R5.2@8510.18,10288.5 cw(c8548.43,10288.5) 8521.38,10315.56 ; 8623.1,10833.1 cw(c8682,10774.21) v1@8682,10857.5 ; 8648.71,10858.71 cw(c8682,10825.42) v1@8682,10872.5 ; v1@8670.63,11062.37 ccw(c8640.75,11092.25) 8683,11092.25 ccw(c8725.25,11092.25) v1@8695.37,11062.37
NetR6_1: R6.1 R8.2 U6.1 | length 390.8
  Bottom Layer w15: U6.1@10716,8483 10745.31,8483 R6.1@10792,8436.31 ; 10754.4,8473.91 cw(c10716.79,8436.31) R6.1@10769.97,8436.31 ; 10763.9,8464.41 ccw(c10788.06,8488.57) R6.1@10788.06,8454.4 ; R6.1@10794.33,8433.97 R6.1@10792,8436.31 ; R6.1@10810.93,8426.18 cw(c10830,8413.29) 10830,8436.31 ; R6.1@10810.93,8446.44 ccw(c10830,8459.33) 10830,8436.31 ; R8.2@10888.9,8424.21 ccw(c10858.02,8393.33) 10858.02,8437 ccw(c10858.02,8480.67) R8.2@10888.9,8449.79 ; R8.2@10901.69,8437 10830.69,8437 10830,8436.31 ; R6.1@10792,8436.31 10830,8436.31
NetR6_2: R6.2 R7.1 U6.2 | length 471.6
  Bottom Layer w15: U6.2@10666,8483 10666,8417.47 10705.69,8377.77 R7.1@10705.69,8246 ; R7.1@10692.9,8262.73 ccw(c10662.02,8293.61) 10705.69,8293.61 ccw(c10749.37,8293.61) R7.1@10718.48,8262.73 ; 10711,8349.69 R6.2@10792,8349.69 ; R6.2@10775.27,8336.9 ccw(c10744.39,8306.02) 10744.39,8349.69 ccw(c10744.39,8393.37) R6.2@10775.27,8362.48
NetR9_1: R9.1 R10.1 U6.3 | length 612.1
  Bottom Layer w15: R10.1@10596.52,8229.27 cw(c10565.63,8198.39) 10609.31,8198.39 cw(c10652.98,8198.39) R10.1@10622.1,8229.27 ; R10.1@10596.52,8262.73 ccw(c10549.47,8309.77) 10616,8309.77 ; 10616,8277.45 ccw(c10636.82,8277.45) R10.1@10622.1,8262.73 ; U6.3@10616,8483 10616,8252.69 R10.1@10609.31,8246 10609.31,8190.69 10645,8155 R9.1@10705.69,8155 ; R9.1@10692.9,8142.21 ccw(c10662.02,8111.33) 10662.02,8155 ccw(c10662.02,8198.67) R9.1@10692.9,8167.79
NetR11_1: R11.1 R13.2 U6.14 | length 436.9
  Bottom Layer w15: U6.14@10716,8737 10745.31,8737 R11.1@10792,8783.69 R11.1@10792.31,8784 ; U6.14@10719.54,8729.46 cw(c10737.73,8711.27) 10737.73,8737 ; 10754.4,8746.09 ccw(c10716.79,8783.69) R11.1@10769.97,8783.69 ; 10763.9,8755.59 cw(c10788.06,8731.43) R11.1@10788.06,8765.6 ; R11.1@10796.33,8788.03 R11.1@10792.31,8784 ; R11.1@10808.73,8770.9 cw(c10840.35,8739.28) 10840.35,8784 ; R11.1@10808.73,8796.48 ccw(c10838.87,8826.63) 10838.87,8784 ; R13.2@10888.9,8771.21 ccw(c10858.02,8740.33) 10858.02,8784 ccw(c10858.02,8827.67) R13.2@10888.9,8796.79 ; R13.2@10901.69,8784 R11.1@10792.31,8784
NetR11_2: R11.2 R12.1 U6.13 | length 471.6
  Bottom Layer w15: U6.13@10666,8737 10666,8802.53 10705.69,8842.23 R12.1@10705.69,8974 ; R12.1@10692.9,8957.27 cw(c10662.02,8926.39) 10705.69,8926.39 cw(c10749.37,8926.39) R12.1@10718.48,8957.27 ; 10711,8870.31 R11.2@10792,8870.31 ; R11.2@10775.27,8857.52 ccw(c10744.39,8826.63) 10744.39,8870.31 ccw(c10744.39,8913.98) R11.2@10775.27,8883.1
NetR14_1: R14.1 R15.1 U6.12 | length 612.1
  Bottom Layer w15: R15.1@10596.52,8957.27 cw(c10549.47,8910.23) 10616,8910.23 ; R15.1@10596.52,8990.73 ccw(c10565.63,9021.61) 10609.31,9021.61 ccw(c10652.98,9021.61) R15.1@10622.1,8990.73 ; U6.12@10616,8737 10616,8967.31 R15.1@10609.31,8974 10609.31,9029.31 10645,9065 R14.1@10705.69,9065 ; 10616,8942.55 cw(c10636.82,8942.55) R15.1@10622.1,8957.27 ; 10657.34,9065 cw(c10657.34,9014.71) R14.1@10692.9,9050.27 ; 10666.69,9065 ccw(c10666.69,9102.06) R14.1@10692.9,9075.85
NetR16_2: R16.2 U1002.6 | length 5953.6
  Top Layer w15: v1@9469.63,10887.37 ccw(c9439.75,10917.25) 9482,10917.25 ccw(c9524.25,10917.25) v1@9494.37,10887.37 ; v1@9470.63,11037.63 cw(c9443.17,11010.17) 9482,11010.17 ; v1(9482,10875) v1@9482,11044 ; 9482,11005.34 cw(c9527.66,11005.34) v1@9495.37,11037.63
  Bottom Layer w15: U1002.6@6464.42,10124.42 ccw(c6426.82,10086.82) 6426.82,10140 ccw(c6426.82,10193.18) U1002.6@6464.42,10155.58 ; U1002.6@6480,10140 6410,10140 6300,10250 6250,10250 6100,10400 6100,10932.72 6404.78,11237.5 9374.5,11237.5 9483,11129 v1(9483,11050) ; R16.2@9292.09,10286.26 9365,10359.17 9365,10775 9465,10875 v1(9482,10875) ; R16.2@9292.09,10308.29 ccw(c9292.09,10361.47) 9329.69,10323.86 ; R16.2@9310.18,10290.2 cw(c9344.35,10290.2) 9320.19,10314.36 ; 9423.1,10833.1 cw(c9482,10774.21) v1@9482,10857.5 ; 9448.71,10858.71 cw(c9482,10825.42) v1@9482,10872.5 ; v1@9470.63,11062.37 ccw(c9440.75,11092.25) 9483,11092.25 ccw(c9525.25,11092.25) v1@9495.37,11062.37
NetR22_2: R22.2 U1002.13 | length 8763.2
  Top Layer w15: v1@11054.63,10892.37 ccw(c11024.75,10922.25) 11067,10922.25 ccw(c11109.25,10922.25) v1@11079.37,10892.37 ; v1@11055.63,11037.63 cw(c11028.17,11010.17) 11067,11010.17 ; v1(11067,10880) v1@11067,11049 ; 11067,11005.34 cw(c11112.66,11005.34) v1@11080.37,11037.63
  Bottom Layer w15: U1002.13@6464.42,9424.42 ccw(c6426.82,9386.82) 6426.82,9440 ccw(c6426.82,9493.18) U1002.13@6464.42,9455.58 ; U1002.13@6480,9440 6390,9440 6320,9370 6132.99,9370 5973.62,9529.37 5973.62,9617.97 5925.3,9666.3 5925.3,9908.7 5973.62,9957.03 5984.75,9957.03 6010,9982.28 6010,10970 6367.5,11327.5 10865.5,11327.5 10868.23,11324.77 10868.23,11323.87 10892.95,11299.15 10893.85,11299.15 11068,11125 v1(11068,11050) ; R22.2@10877.09,10291.26 10948.78,10362.95 ; R22.2@10877.09,10312.97 ccw(c10877.09,10365.39) 10914.15,10328.33 ; R22.2@10895.18,10294.88 cw(c10930.11,10294.88) 10905.41,10319.58 ; 10950,10368.39 10950,10780 11050,10880 v1(11067,10880) ; 11008.1,10838.1 cw(c11067,10779.21) v1@11067,10862.5 ; 11033.71,10863.71 cw(c11067,10830.42) v1@11067,10877.5 ; v1@11055.63,11062.37 ccw(c11025.75,11092.25) 11068,11092.25 ccw(c11110.25,11092.25) v1@11080.37,11062.37
NetR23_2: R23.2 U1002.4 | length 3959.6
  Top Layer w15: v1@7869.63,10887.37 ccw(c7839.75,10917.25) 7882,10917.25 ccw(c7924.25,10917.25) v1@7894.37,10887.37 ; v1@7870.63,11037.63 cw(c7843.17,11010.17) 7882,11010.17 ; v1(7882,10875) v1@7882,11044 ; 7882,11005.34 cw(c7927.66,11005.34) v1@7895.37,11037.63
  Bottom Layer w15: 6414.75,10345 cw(c6414.75,10274.75) U1002.4@6464.42,10324.42 ; 6438.89,10345 ccw(c6438.89,10381.11) U1002.4@6464.42,10355.58 ; U1002.4@6480,10340 6475,10345 6282.28,10345 6190,10437.28 6190,10895.44 6442.06,11147.5 7842.5,11147.5 7883,11107 v1(7883,11050) ; R23.2@7692.09,10286.26 7765,10359.17 7765,10775 7865,10875 v1(7882,10875) ; R23.2@7692.09,10308.29 ccw(c7692.09,10361.47) 7729.69,10323.86 ; R23.2@7710.18,10290.2 cw(c7744.35,10290.2) 7720.19,10314.36 ; 7823.1,10833.1 cw(c7882,10774.21) v1@7882,10857.5 ; 7848.71,10858.71 cw(c7882,10825.42) v1@7882,10872.5 ; v1@7870.63,11062.37 ccw(c7840.75,11092.25) 7883,11092.25 ccw(c7925.25,11092.25) v1@7895.37,11062.37
NetR26_2: R26.2 U1002.25 | length 4029.9
  Bottom Layer w15: U1002.25@6780,10340 6933.28,10340 7151,10122.28 7151,9854.64 7512.5,9493.14 7512.5,7751.14 7690.64,7573 8107,7573 8198,7482 R26.2@8296.69,7482 ; U1002.25@6795.58,10324.42 cw(c6833.18,10286.82) 6833.18,10340 cw(c6833.18,10393.18) U1002.25@6795.58,10355.58 ; R26.2@8283.9,7469.21 ccw(c8253.02,7438.33) 8253.02,7482 ccw(c8253.02,7525.67) R26.2@8283.9,7494.79
NetR27_2: R27.2 U1002.24 | length 4286.4
  Bottom Layer w15: U1002.24@6780,10240 6969.64,10240 7106,10103.64 7106,9836 7467.5,9474.5 7467.5,7732.5 7672,7528 8085,7528 8188,7425 8188,7195.69 R27.2@8296.69,7087 ; U1002.24@6795.58,10224.42 cw(c6833.18,10186.82) 6833.18,10240 cw(c6833.18,10293.18) U1002.24@6795.58,10255.58 ; 8259.09,7124.6 ccw(c8296.69,7162.21) R27.2@8296.69,7109.03 ; 8268.59,7115.1 cw(c8244.43,7090.94) R27.2@8278.6,7090.94
NetR30_2: R30.2 U1002.23 | length 4566.9
  Bottom Layer w15: R30.2@6187.61,7694.28 cw(c6187.61,7641.1) 6225.22,7678.7 ; R30.2@6187.61,7716.31 6246,7657.92 6246,7344 6300,7290 6690,7290 7422.5,8022.5 7422.5,9455.86 7061,9817.36 7061,10085 7006,10140 U1002.23@6780,10140 ; R30.2@6205.7,7712.37 ccw(c6239.87,7712.37) 6215.71,7688.21 ; U1002.23@6795.58,10124.42 cw(c6833.18,10086.82) 6833.18,10140 cw(c6833.18,10193.18) U1002.23@6795.58,10155.58
NetR1003_2: R1003.2 U1004.17 | length 248.1
  Bottom Layer w15: U1004.17@6947.17,8785 R1003.2@7126.69,8785 ; R1003.2@7113.9,8772.21 ccw(c7083.02,8741.33) 7083.02,8785 ccw(c7083.02,8828.67) R1003.2@7113.9,8797.79
NetR1005_1: R1005.1 U1005.8 | length 224.4
  Bottom Layer w15: R1005.1@5952.21,8873.27 cw(c5921.33,8842.39) 5965,8842.39 cw(c6008.67,8842.39) R1005.1@5977.79,8873.27 ; 5965,8830.18 ccw(c6002.68,8830.18) U1005.8@5976.04,8803.54 ; R1005.1@5965,8890 5965,8815 5980,8800 U1005.8@6010,8800
RXCAN: U1004.2 U1005.4 | length 612.4
  Bottom Layer w15: U1005.4@6260,8650 6645,8650 6690,8695 6690,8745 6650,8785 U1004.2@6592.83,8785
TXCAN: U1004.1 U1005.1 | length 359.8
  Bottom Layer w15: U1005.1@6260,8800 6425,8800 6490,8735 U1004.1@6592.83,8735
USART_RTS: C1012.2 P1001.1 | length 332.9
  Bottom Layer w15: P1001.1@6322,10839 6413.69,10839 C1012.2@6476.69,10776 ; P1001.1@6337.58,10823.42 cw(c6375.18,10785.82) 6375.18,10839 cw(c6375.18,10892.18) P1001.1@6337.58,10854.58 ; 6439.09,10813.6 ccw(c6476.69,10851.21) C1012.2@6476.69,10798.03 ; 6448.59,10804.1 cw(c6424.43,10779.94) C1012.2@6458.6,10779.94
USART_RX: P1001.4 U1002.2 | length 325.5
  Bottom Layer w15: P1001.4@6322,10539 6323,10540 U1002.2@6480,10540 ; P1001.4@6337.58,10523.42 cw(c6377.59,10483.41) 6377.59,10540 ; P1001.4@6337.58,10554.58 ccw(c6372.76,10589.76) 6372.76,10540 ; U1002.2@6464.42,10524.42 ccw(c6426.82,10486.82) 6426.82,10540 ccw(c6426.82,10593.18) U1002.2@6464.42,10555.58
USART_TX: P1001.5 U1002.3 | length 325.5
  Bottom Layer w15: P1001.5@6322,10439 6323,10440 U1002.3@6480,10440 ; P1001.5@6337.58,10423.42 cw(c6377.59,10383.41) 6377.59,10440 ; P1001.5@6337.58,10454.58 ccw(c6372.76,10489.76) 6372.76,10440 ; U1002.3@6464.42,10424.42 ccw(c6426.82,10386.82) 6426.82,10440 ccw(c6426.82,10493.18) U1002.3@6464.42,10455.58
XTAL1: C1010.2 U1002.9 Y1001.1 | length 878.5
  Bottom Layer w15: C1010.2@6120,9845 Y1001.1@6268.94,9845 ; C1010.2@6132.79,9832.21 cw(c6163.67,9801.33) 6163.67,9845 cw(c6163.67,9888.67) C1010.2@6132.79,9857.79 ; 6188.97,9845 ccw(c6188.97,9927.09) Y1001.1@6247.02,9869.04 ; 6194.1,9845 cw(c6194.1,9770.17) Y1001.1@6247.02,9823.08 ; 6225.19,9845 ccw(c6225.19,9890.88) Y1001.1@6257.63,9858.44 ; Y1001.1@6270,9846.06 U1002.9@6468.94,9846.06 ; Y1001.1@6282.37,9833.69 cw(c6312.25,9803.81) 6312.25,9846.06 cw(c6312.25,9888.31) Y1001.1@6282.37,9858.44 ; Y1001.1@6292.98,9823.08 cw(c6348.46,9767.6) 6348.46,9846.06 cw(c6348.46,9924.52) Y1001.1@6292.98,9869.04 ; 6412.18,9846.06 cw(c6412.18,9772.18) U1002.9@6464.42,9824.42 ; 6441.46,9846.06 ccw(c6441.46,9878.54) U1002.9@6464.42,9855.58 ; 6448.4,9846.06 cw(c6448.4,9808.4) U1002.9@6475.03,9835.03
XTAL2: C1011.2 U1002.10 Y1001.2 | length 856.6
  Bottom Layer w15: C1011.2@6120,9707.97 cw(c6120,9654.79) 6157.6,9692.4 ; C1011.2@6120,9730 6196.06,9653.94 ; C1011.2@6138.09,9726.06 ccw(c6172.26,9726.06) 6148.1,9701.9 ; Y1001.2@6246.05,9631.96 ccw(c6196.07,9586.09) 6196.07,9653.94 ; Y1001.2@6246.05,9675.91 cw(c6196.07,9721.78) 6196.07,9653.94 ; Y1001.2@6270,9653.94 6196.06,9653.94 ; Y1001.2@6270,9665 6350,9745 U1002.10@6470,9745 ; Y1001.2@6270,9686.44 ccw(c6270,9738.19) 6306.6,9701.6 ; Y1001.2@6287.5,9653.94 cw(c6356.46,9653.94) 6307.7,9702.7 ; Y1001.2@6302.5,9653.94 cw(c6407.67,9653.94) 6333.3,9728.3 ; 6414.75,9745 cw(c6414.75,9674.75) U1002.10@6464.42,9724.42 ; 6438.89,9745 ccw(c6438.89,9781.11) U1002.10@6464.42,9755.58
pads on no net: J1001.6 J1002.6 J1003.6 J1004.6 K1.2 K2.2 K3.2 K4.2 K5.2 K7.2 P1001.3 U6.5 U6.6 U6.7 U6.8 U6.9 U6.10 U1002.15 U1002.21 U1002.28 U1004.3 U1004.4 U1004.5 U1004.6 U1004.10 U1004.11 U1005.5
copper on no net:
  other v2: 4100,6900 7700,6900 11100,6900 6790,7930 4100,8700 8200,9500 10400,9500 4100,10500 7200,10800 4100,11900 7700,11900 11000,11900
  other v4: 11045,7240 11045,9275

## Polygon pours and split planes (outlines as drawn)
CAN_GND on Bottom Layer "Bottom Layer-No Net 1" (solid, remove dead copper, pour order 2): 3900,12100 3900,6700 11300,6700 11300,12100

## Other copper
Top Layer:
  rectangle net +BAT_UNFUSED: 11390,10700 12290,11500
  rectangle net +CAP: 11390,7020 12290,7990
  rectangle net +BAT: 11390,8740 12290,9540
Bottom Layer:
  rectangle net +CAP: 7690,7860 12290,7990
  rectangle net +BAT_UNFUSED: 11390,10700 12290,11825
  rectangle net +CAP: 11390,7020 12290,7940
  rectangle net +BAT: 11390,8740 12290,9540

## Silkscreen, mask and mechanical layers (free items; w line width, h text height)
Top Overlay:
  text "+BAT" at 11700,11850 h157.48
  text "PRE" at 4010,9800 h157.48 r270
  text "BAT" at 11610,8470 h157.48
  text "CAP" at 11610,8160 h157.48
  text "POS" at 4010,8100 h157.48 r270
  text "+CAP" at 11700,6775 h157.48
Mechanical 13:
  the board outline again, w5

## Dimensions
4100,8700 to 4100,6900 on Top Overlay
4100,10500 to 4100,8700 on Top Overlay
4100,11900 to 4100,10500 on Top Overlay
7700,11900 to 11000,11900 on Top Overlay
4100,11900 to 7700,11900 on Top Overlay
12400,6700 to 12400,12100 on Top Overlay
3900,6700 to 12400,6700 on Top Overlay

## Text inside footprints (layer, text, board x,y; h text height)
C6: Top Overlay "-" at 9642.8,6914 h59.06; Top Overlay "+" at 9502.8,6914 h59.06
C1002: Top Overlay "-" at 5440,10675 h59.06 r270; Top Overlay "+" at 5440,10815 h59.06 r270
C1003: Top Overlay "-" at 5040,10675 h59.06 r270; Top Overlay "+" at 5040,10815 h59.06 r270
C1007: Top Overlay "-" at 4585,10675 h59.06 r270; Top Overlay "+" at 4585,10815 h59.06 r270